# Altium PCB remote_control_light.PcbDoc
Units mil, origin at the board's own origin, x right, y up, seen from the top; angles counter-clockwise.
Board outline 1968.5 x 3346.46 mil, 2 copper layers (Top Layer, Bottom Layer); 24 components, 14 nets, 101 pads, 8 vias.
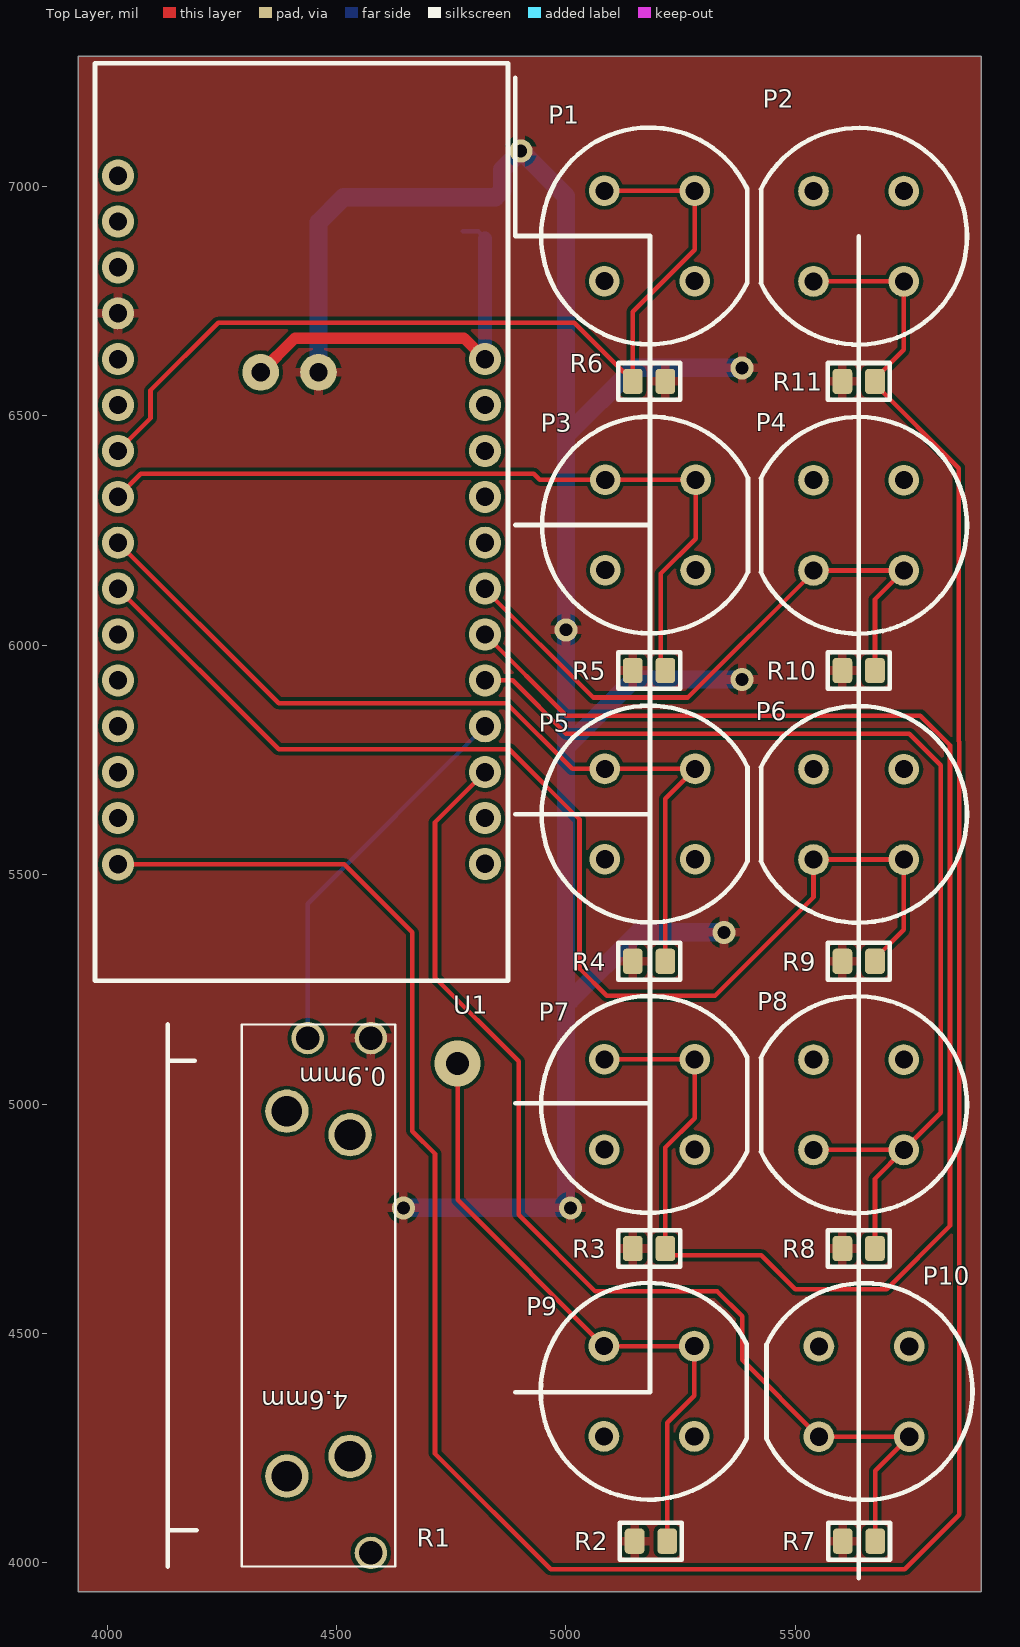
[diagram p0: Top Layer view]
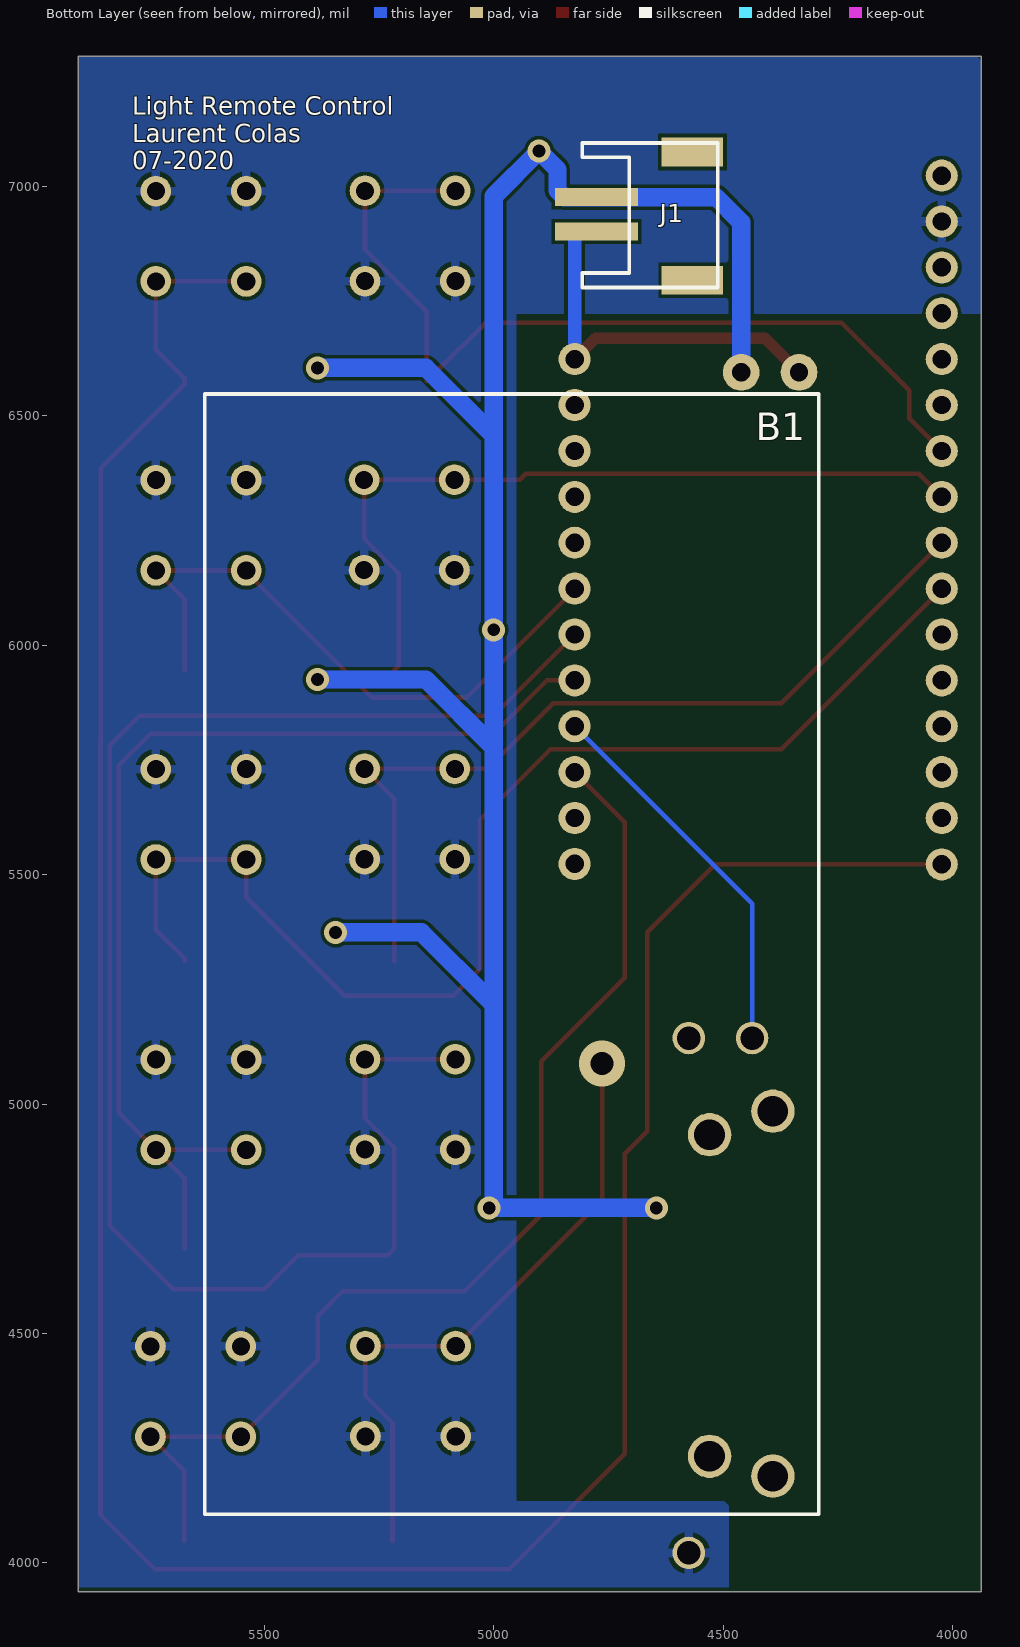
[diagram p1: Bottom Layer view, seen from below]
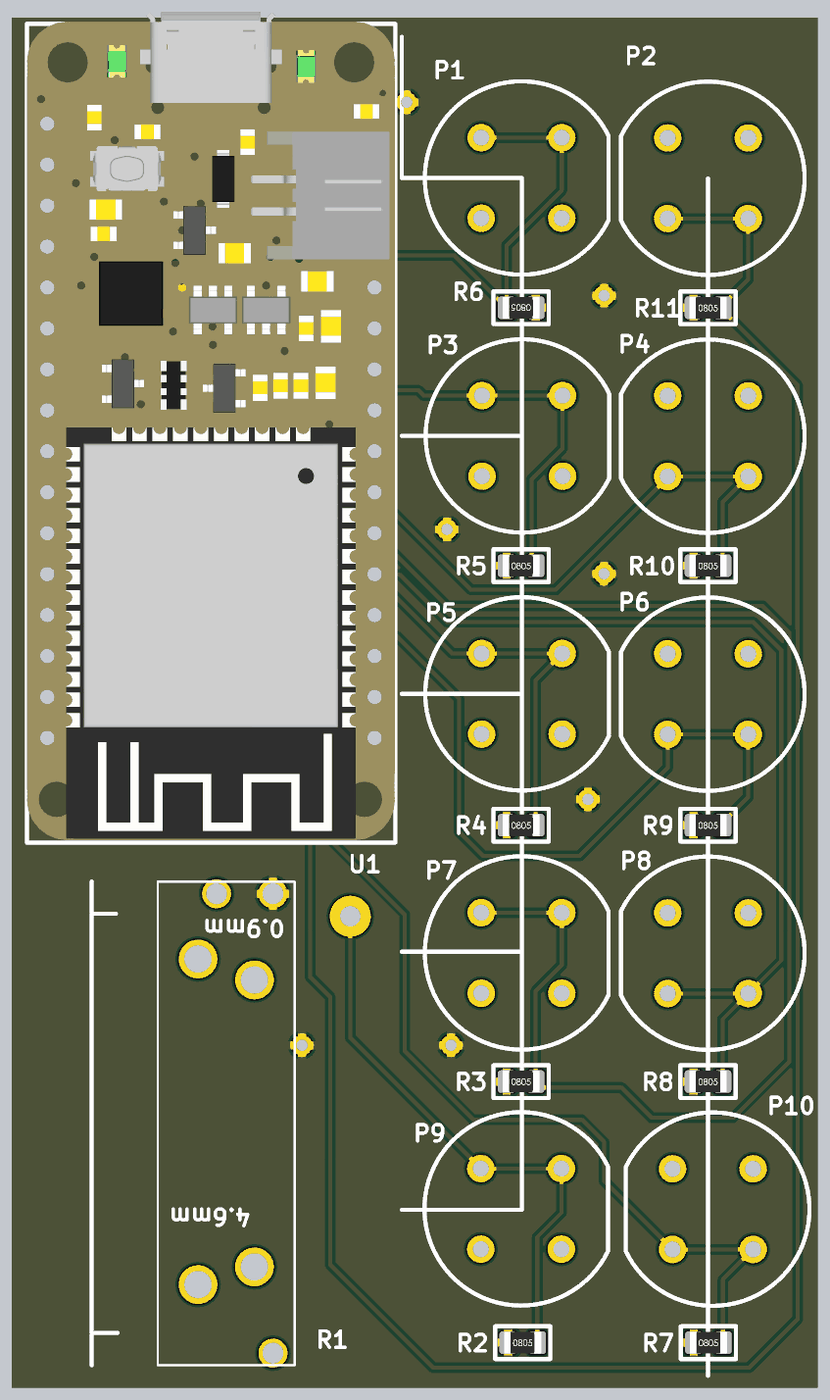
[diagram p2: 3D render of the assembled board from above, using the file's embedded part models]

## Layer stack, top to bottom
Top Solder: solder mask 0.4, Solder Resist, Dk 3.5
Top Layer: signal copper 1.4
Dielectric 1: dielectric 12.6, FR-4, Dk 4.8
Bottom Layer: signal copper 1.4
Bottom Solder: solder mask 0.4, Solder Resist, Dk 3.5

## Board outline
3937.01,3937.01 5905.51,3937.01 5905.51,7283.46 3937.01,7283.46

## Design rules (kind name [scope] priority, off if disabled: settings)
Clearance [All] p1: gap=8 ignorepadtopadclearanceinfootprint=FALSE
PlaneClearance [All] p1: clearance=30
PlaneConnect [All] p1: planeconnectstyle=Relief reliefexpansion=20 reliefentries=4 reliefconductorwidth=15 reliefairgap=10
PolygonConnect [All] p1: connectstyle=Relief reliefconductorwidth=20 reliefentries=4 polygonreliefangle="90 Angle" airgapwidth=10
RoutingVias [All] p1: holewidth=28 width=50 viastyle="Through Hole" minholewidth=28 minwidth=50 maxholewidth=28 maxwidth=50
SolderMaskExpansion [All] p1: expansion=4
UnRoutedNet [All] p1: checkbadconnections=TRUE
Width [All] p1: maxlimit=100 minlimit=10 preferedwidth=10
27 further rules are at their usual default settings.

## Components (designator, comment, footprint, x,y, rotation, side; value= is the part's Value field where it differs from the comment)
B1 "Battery" BATTERY-3.7V-1200MAH 4291.34,6547.24 r0 bottom
J1 "battery connector" "BATTERY CONNECTOR" 4807.09,7094.49 r270 bottom value="Term bloc 2pos"
P1 "PUSH_BUTTON_D6F" PUSH_BUTTON_D6F 5280.51,6793.31 r180 top
P2 "PUSH_BUTTON_D6F" PUSH_BUTTON_D6F 5539.37,6989.51 r0 top
P3 "PUSH_BUTTON_D6F" PUSH_BUTTON_D6F 5282.48,6163.38 r180 top
P4 "PUSH_BUTTON_D6F" PUSH_BUTTON_D6F 5539.37,6359.59 r0 top
P5 "PUSH_BUTTON_D6F" PUSH_BUTTON_D6F 5281.5,5533.47 r180 top
P6 "PUSH_BUTTON_D6F" PUSH_BUTTON_D6F 5539.37,5729.67 r0 top
P7 "PUSH_BUTTON_D6F" PUSH_BUTTON_D6F 5280.51,4900.59 r180 top
P8 "PUSH_BUTTON_D6F" PUSH_BUTTON_D6F 5539.37,5096.8 r0 top
P9 "PUSH_BUTTON_D6F" PUSH_BUTTON_D6F 5279.53,4275.59 r180 top
P10 "PUSH_BUTTON_D6F" PUSH_BUTTON_D6F 5551.18,4471.8 r0 top
R1 "PTA1543" "POT PTA1543" 4726.38,5173.23 r180 top value="POT 10k"
R2 "RES - 0805" RES_0805 5185.04,4047.24 r0 top value=1k
R3 "RES - 0805" RES_0805 5181.1,4685.04 r0 top value=1k
R4 "RES - 0805" RES_0805 5181.1,5311.02 r0 top value=1k
R5 "RES - 0805" RES_0805 5181.1,5944.88 r0 top value=1k
R6 "RES - 0805" RES_0805 5181.1,6574.8 r180 top value=1k
R7 "RES - 0805" RES_0805 5638.71,4047.24 r0 top value=1k
R8 "RES - 0805" RES_0805 5637.86,4685.04 r0 top value=1k
R9 "RES - 0805" RES_0805 5637.86,5311.02 r0 top value=1k
R10 "RES - 0805" RES_0805 5637.86,5944.88 r0 top value=1k
R11 "RES - 0805" RES_0805 5637.86,6574.8 r0 top value=1k
U1 "ESP32_FEATHER_ADAFRUIT" ESP32_FEATHER 4823.62,7023.23 r270 top

## Footprints (in the part's own frame and the unit in brackets; to place one, negate y for a bottom-side part, rotate by r counter-clockwise, add the part's x,y. Pads: shape width x height; smd on the part's side, far side on the other; paste and mask are expansions set on the pad)
"BATTERY CONNECTOR" [mm] "adafruit batery connector"
  rect 1x4.6 smd paste+0 mask+0: 1(3,0.8) 2(4.9,0.8)
  rect 1.6x3.4 smd paste+0 mask+0: 3(0.5,6.1) 3(7.6,6.1)
  silkscreen extent 0,0 8,7.5, body extent 0,1.5 8,7.5, height 4.8
BATTERY-3.7V-1200MAH [mil] "adafruit batery"
  round 80 hole 40: 1(43.31,-47.24) 2(169.29,-47.24)
  silkscreen extent 0,0 1339,2441, body extent 0,0 1339,2441, height 197
ESP32_FEATHER [mil] "ESP32 board"
  round 70 hole 40: 1(1500.98,-800) 2(1400,-800) 3(1300,-800) 4(1200,-800) 5(1100,-800) 6(1000,-800) 7(900,-800) 8(800,-800) 9(700,-800) 10(600,-800) 11(500,-800) 12(400,-800) 13(300,-800) 14(200,-800) 15(100,-800) 16(0,-800) 17(400,0) 18(500,0) 19(600,0) 20(700,0) 21(800,0) 22(900,0) 23(1000,0) 24(1100,0) 25(1200,0) 26(1300,0) 27(1400,0) 28(1500,0)
  silkscreen extent -245,-850 1755,50, body extent -273,-850 1749,50, height 251
"POT PTA1543" [mm] "potentiometre 20mm"
  round 1.8 hole 1.3: 1(3.85,0.75) 2(7.35,0.75) 3(3.85,29.25)
  round 2.4 hole 1.7: ""(5,23.9) ""(5,6.1) ""(8.5,25) ""(8.5,4.8)
  silkscreen extent 2.5,0 15.1,30, body extent 8.6,0 25.1,30, height 9.4
PUSH_BUTTON_D6F [mm] "push button d6f"
  round 1.7 hole 1: 1(0,0) 1(5,0) 2(0,-5) 2(5,-5)
  silkscreen extent -2.91,-8.5 8.5,3.5, body extent -2.91,-8.48 8.43,3.5, height 5.8
RES_0805 [mil]
  rrect37% 43x55 smd: 1(-35.5,0) 2(35.5,0)
  silkscreen extent -68,-40 67,40, body extent -45,-27 45,27, height 30

## Part data
J1: library part CONN_BATT, "surface mount battery connector", Mfg Part Number=1935161, Package=None, Supplier Part Number=277-1667-ND, Digi-Key_Part_Number=277-1667-ND, Digi-Key_Purchase_URL=https://www.digikey.ca/product-detail/en/phoenix-contact/1935161/277-1667-ND/568614?utm_source=snapeda&utm_medium=aggregator&utm_campaign=symbol, HelpURL=https://media.digikey.com/pdf/Data%20Sheets/Phoenix%20Contact%20PDFs/1935161.pdf, MF="Phoenix Contact", MP=1935161, SnapEDA_Link=https://www.snapeda.com/parts/1935161/Phoenix%20Contact/view-part/423515/?ref=snap
R1: library part "POT PTA1543", "10 kOhms 0.05W, 1/20W Through Hole Slide Potentiometer Top Adjustment Type", Mfg Part Number=3310P-025-103L, Package=None, Supplier Part Number=3310P-025-103L-ND, Digi-Key_Part_Number=3310P-025-103L-ND, Digi-Key_Purchase_URL=https://www.digikey.com/product-detail/en/bourns-inc/3310P-025-103L/3310P-025-103L-ND/2537831?utm_source=snapeda&utm_medium=aggregator&utm_campaign=symbol, HelpURL=https://www.bourns.com/docs/Product-Datasheets/3310.pdf, MF=Bourns, MP=3310P-025-103L, SnapEDA_Link=https://www.snapeda.com/parts/3310P-025-103L/Bourns/view-part/587282/?ref=snap
R2 R3 R4 R5 R6 R7 R8 R9 R10 R11: Package=0805, CreatedBy="Jonathan Bouchard", Precision=1%

## Via types
v1: diameter 50, hole 28, Top Layer to Bottom Layer, 7 vias
v2: diameter 100, hole 50, Top Layer to Bottom Layer, 1 vias

## Nets (pads, with @x,y where several pads share a name; then routed paths per layer and width w, separated by ;. In a path a pad name is that pad's centre, name@x,y a point inside that pad or via, vN(x,y) a via of type N, cw(c..) or ccw(c..) an arc to the next point about the centre after c; other vN are vias at no path point)
3V3: P1.1 P2.1 P3.1 P4.1 P5.1 P6.1 P7.1 P8.1 P9.1 P10.1 R1.3 U1.15
GND: B1.2 J1.1 R1.1 R2.1 R3.1 R4.1 R5.1 R6.1 R7.1 R8.1 R9.1 R10.1 R11.1 U1.13 | length 4856.6
  Bottom Layer w40: B1.2 4460.63,6921.26 4515.75,6976.38 J1.1 4846.46,6976.38 4861.14,6991.06 4861.14,7036.34 v1(4901.57,7076.77) 5000,6978.35 5000,6456.69 ; v1(4645.67,4773.62) v1(5009.84,4773.62) 5000,4783.46 5000,5777.56 ; 5009.84,5226.38 5157.48,5374.02 v1(5344.49,5374.02) ; v1(5383.86,5925.2) 5147.64,5925.2 5000,5777.56 ; v1(5383.86,6604.33) 5147.64,6604.33 5000,6456.69 ; 5000,5777.56 v1(5000,6033.46) 5000,6456.69
GPI33: P7.2 R3.2 U1.23 | length 3510.3
  Top Layer w10: U1.23 5000.39,5846.46 5772.02,5846.46 5836.93,5781.54 5836.93,4734.57 5698.82,4596.46 5499.8,4596.46 5425.76,4670.49 5231.15,4670.49 R3.2 5216.6,4905.22 5280.51,4969.13 5280.51,5097.44 P7.2@5083.66,5097.44
GPI34: P1.2 R6.2 U1.10 | length 1992.8
  Top Layer w10: U1.10 4094.49,6494.09 4094.49,6555.12 4242.13,6702.76 5017.65,6702.76 5124.93,6595.48 5129.33,6595.48 R6.2@5145.6,6579.2 ; P1.2@5083.66,6990.16 5280.51,6990.16 5280.51,6861.85 5145.6,6726.94 R6.2@5145.6,6579.2 ; R6.2 R6.2@5145.6,6579.2
GPI36: P5.2 R4.2 U1.8 | length 1930
  Top Layer w10: U1.8 4373.62,5873.23 4870.47,5873.23 5013.39,5730.31 5069.24,5730.31 5084.65,5745.72 5084.65,5730.31 5281.5,5730.31 5216.6,5665.42 R4.2
GPI39: P3.2 R5.2 U1.9 | length 1735.8
  Top Layer w10: U1.9 4073.62,6373.23 4930.07,6373.23 4943.06,6360.23 5085.63,6360.23 5282.48,6360.23 5282.48,6231.96 5206.69,6156.18 5206.69,5954.79 R5.2
GPIO4: P6.2 R9.2 U1.7 | length 2689
  Top Layer w10: U1.7 4373.62,5773.23 4876.38,5773.23 5029.53,5620.08 5029.53,5295.28 5088.58,5236.22 5324.8,5236.22 5539.37,5450.79 5539.37,5532.82 5736.22,5532.82 5736.22,5379.88 5673.36,5317.02 R9.2
GPIO14: P10.2 R7.2 U1.26 | length 2450.8
  Top Layer w10: U1.26 4714.57,5614.17 4714.57,5275.59 4896.65,5093.5 4896.65,4758.86 5063.98,4591.54 5329.72,4591.54 5383.86,4537.4 5383.86,4442.27 5551.18,4274.94 5748.03,4274.94 5674.21,4201.13 R7.2
GPIO15: P8.2 R8.2 U1.24 | length 2379.4
  Top Layer w10: U1.24 4883.86,5923.23 5000,5807.09 5748.03,5807.09 5816.93,5738.19 5816.93,4980.65 P8.2@5736.22,4899.94 ; P8.2@5539.37,4899.94 P8.2@5736.22,4899.94 ; R8.2 5673.36,4837.09 P8.2@5736.22,4899.94
GPIO21: P2.2 R11.2 U1.1 | length 6141.9
  Top Layer w10: U1.1 4517.13,5522.24 4665.35,5374.02 4665.35,4940.94 4714.57,4891.73 4714.57,4238.14 4966.49,3986.22 5738.19,3986.22 5856.93,4104.96 5856.93,5789.83 5856.3,5790.46 5856.3,6385.87 5673.36,6568.8 R11.2 5673.36,6580.8 5736.22,6643.66 5736.22,6792.66 P2.2@5539.37,6792.66
GPIO27: P4.2 R10.2 U1.22 | length 1372.6
  Top Layer w10: U1.22 4823.62,6121.26 5059.06,5885.83 5265.75,5885.83 5539.37,6159.45 5539.37,6162.74 5736.22,6162.74 5673.36,6099.88 R10.2
GPIO35: P9.2 R2.2 | length 1394.7
  Top Layer w10: v2(4763.78,5088.58) 4763.78,4791.34 5082.68,4472.44 5279.53,4472.44 5279.53,4364.17 5220.54,4305.18 R2.2
IO32: R1.2 U1.25 | length 839.7
  Bottom Layer w10: R1.2 4437.01,5436.61 U1.25
VBAT: B1.1 J1.2 U1.17 | length 856.8
  Top Layer w25: B1.1 4409.45,6669.29 4777.56,6669.29 U1.17
  Bottom Layer w10: J1.2 4808.94,6901.58 J1.2@4823.62,6886.89
  Bottom Layer w30: U1.17 J1.2@4823.62,6886.89
pads on no net: J1.3 R1. U1.2 U1.3 U1.4 U1.5 U1.6 U1.11 U1.12 U1.14 U1.16 U1.18 U1.19 U1.20 U1.21 U1.27 U1.28

## Polygon pours and split planes (outlines as drawn)
3V3 on Bottom Layer "Bottom Layer-3V3 1" (solid, pour order 10): 5905.51,3946.85 4950.79,3946.85 4950.79,6722.44 3937.01,6722.44 3937.01,7273.62 3946.85,7283.46 5905.51,7283.46
3V3 on Bottom Layer "Bottom Layer-3V3" (solid, pour order 12): 4950.79,3946.85 4488.19,3946.85 4488.19,4124.02 4498.03,4133.86 4950.79,4133.86
no net on Bottom Layer "Bottom Layer-No Net" (solid, pour order 8): 5905.51,3946.85
GND on Top Layer "Top Layer-GND" (solid, pour order 4): 3937.01,7283.46 3937.01,3937.01 5905.51,3937.01 5905.51,7283.46

## Silkscreen, mask and mechanical layers (free items; w line width, h text height)
Top Overlay:
  lines w10: 4889.76,4372.05 5183.07,4372.05 5183.07,5001.97 ; 4889.76,5001.97 5183.07,5001.97 ; 4889.76,5631.89 5183.07,5631.89 ; 4889.76,6261.81 5183.07,6261.81 ; 4889.76,7236.22 4889.76,6891.73 5183.07,6891.73 5183.07,6261.81 ; 5637.8,3966.54 5637.8,6890.75 ; 5183.07,5001.97 5183.07,5631.89 ; 5183.07,5631.89 5183.07,6261.81
Bottom Overlay:
  text "Light Remote Control / Laurent Colas / 07-2020" at 5787.4,7037.4 h39.37
Mechanical 1:
  the board outline again, w10

## Text inside footprints (layer, text, board x,y; h text height)
R1: Top Overlay "4.6mm" at 4525.59,4374.02 h39.37 r180; Top Overlay "0.9mm" at 4608.27,5078.74 h39.37 r180